# Altium PCB SensorNode_V1.PcbDoc
Units mm, origin at the board's own origin, x right, y up, seen from the top; angles counter-clockwise.
Board outline 82.25 x 54.49 mm, 2 copper layers (Top Layer, Bottom Layer); 19 components, 17 nets, 110 pads, 3 vias.
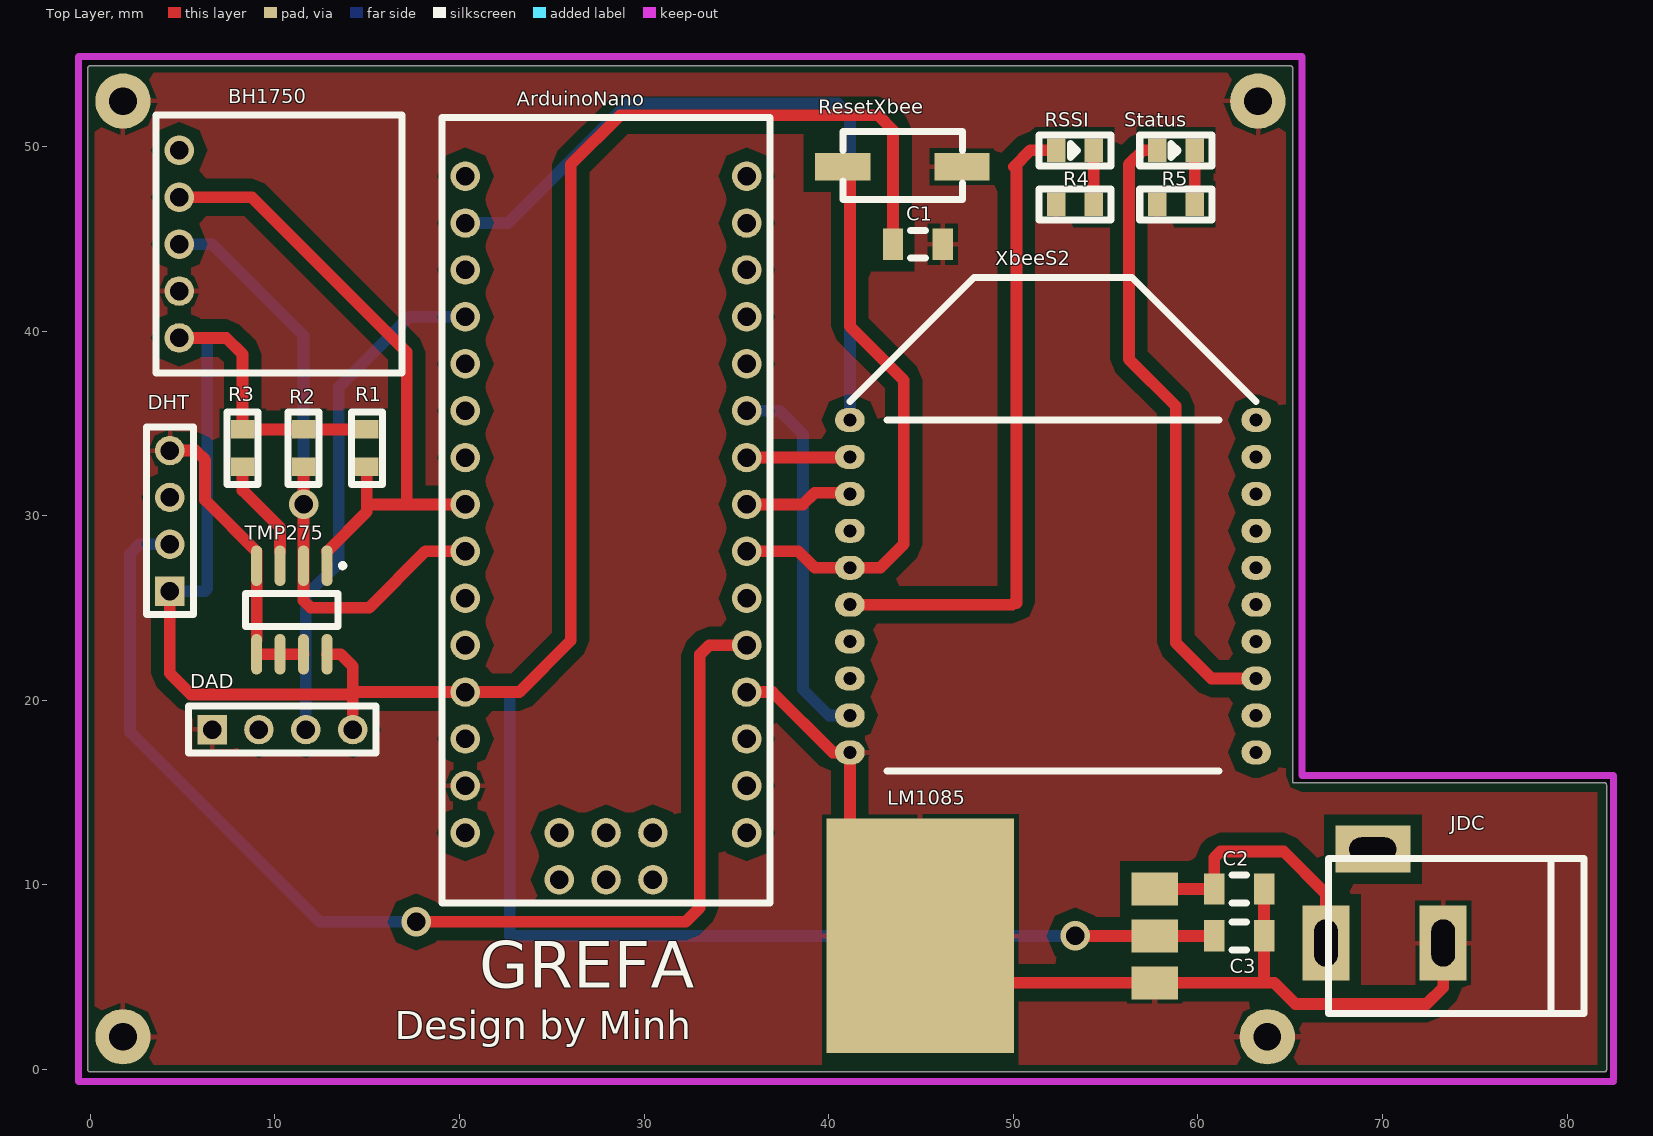
[diagram p0: Top Layer view]
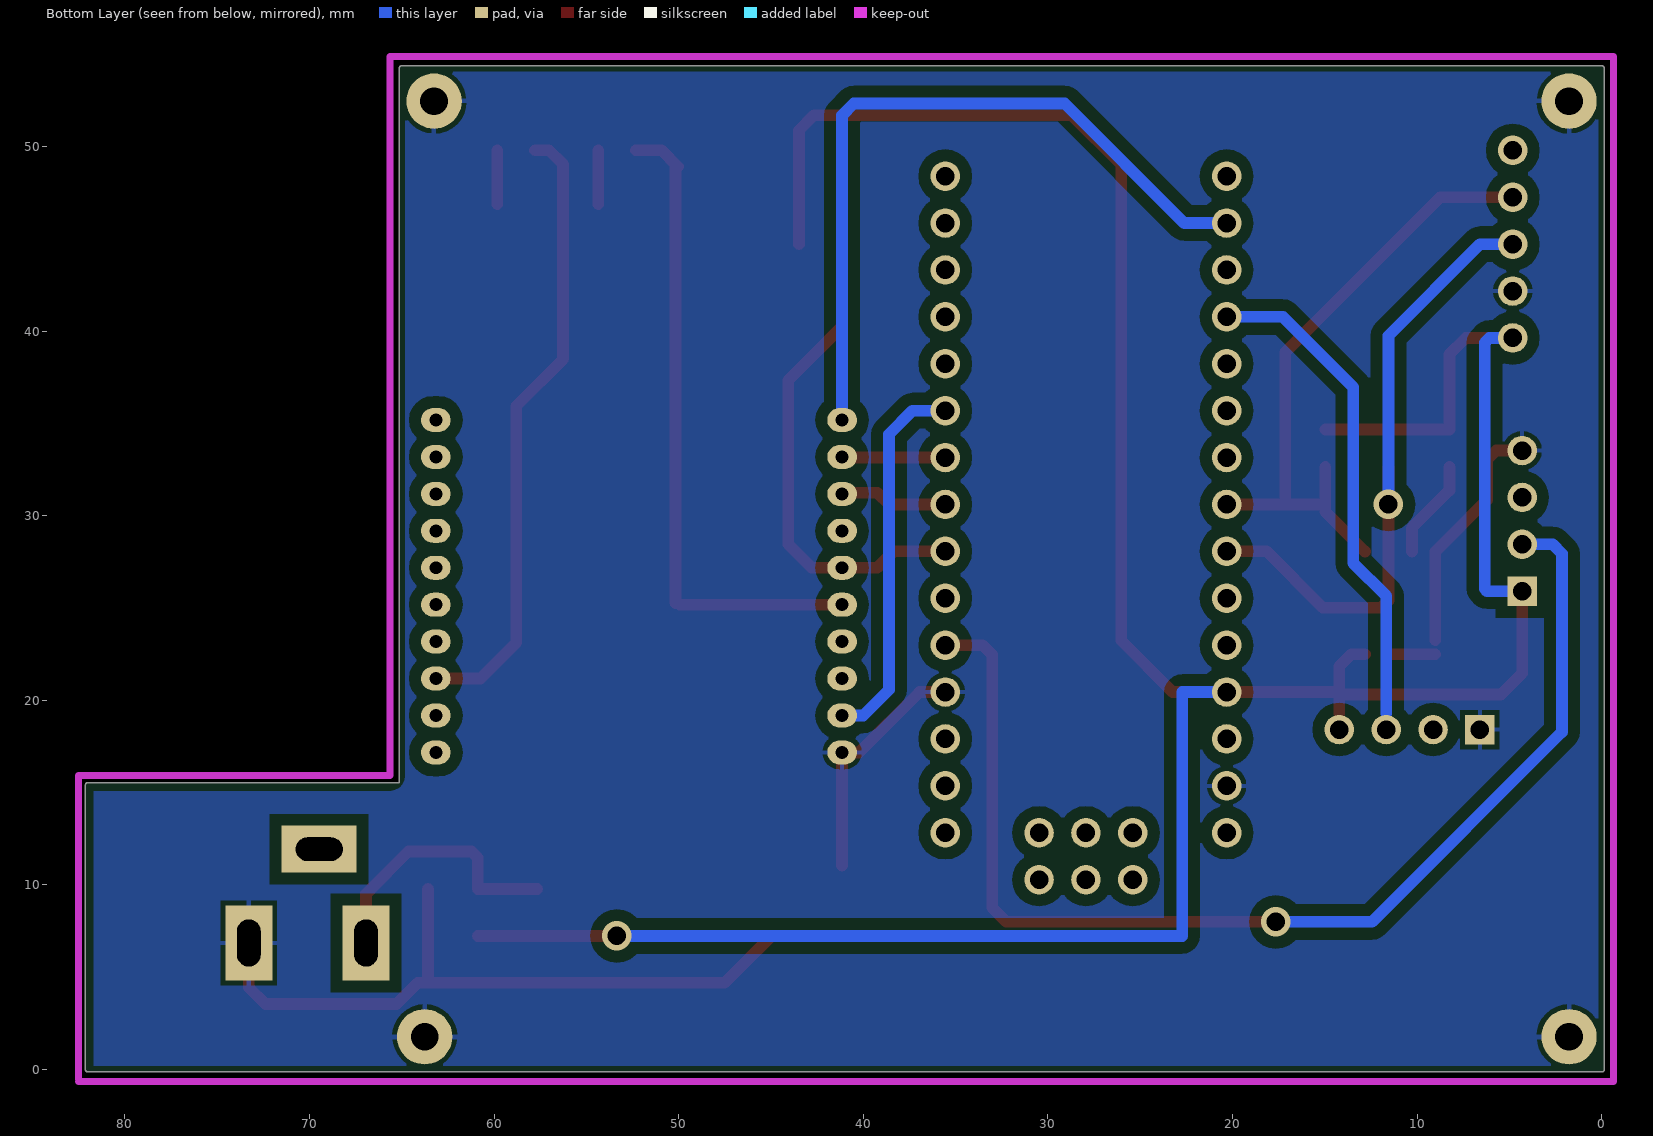
[diagram p1: Bottom Layer view, seen from below]

## Layer stack, top to bottom
Top Solder: solder mask 0.0102, Solder Resist, Dk 3.5
Top Layer: signal copper 0.0356
Dielectric 1: dielectric 0.32, FR-4, Dk 4.8
Bottom Layer: signal copper 0.0356
Bottom Solder: solder mask 0.0102, Solder Resist, Dk 3.5

## Board outline
-0.127,0 ccw(c0,0) 0,-0.127 82,-0.127 ccw(c82,0) 82.127,0 82.127,15.413 ccw(c82,15.413) 82,15.54 65.127,15.54 65.127,54.238 ccw(c65,54.238) 65,54.365 0,54.365 ccw(c0,54.238) -0.127,54.238

## Design rules (kind name [scope] priority, off if disabled: settings)
Clearance [All] p1: gap=0.635
PolygonConnect [All] p1: connectstyle=Relief reliefconductorwidth=0.254 reliefentries=4 polygonreliefangle="90 Angle" airgapwidth=0.254
RoutingVias [All] p1: holewidth=0.711 width=1.27 viastyle="Through Hole" minholewidth=0.711 minwidth=1.27 maxholewidth=0.711 maxwidth=1.27
SolderMaskExpansion [All] p1: expansion=0.102
Width [All] p1: maxlimit=0.762 minlimit=0.508 preferedwidth=0.635
30 further rules are at their usual default settings.

## Components (designator, comment, footprint, x,y, rotation, side; value= is the part's Value field where it differs from the comment)
ArduinoNano "ArduinoNano" ArduinoNano 20.32,12.827 r0 top
BH1750 "BH1750" BH1750 4.826,49.784 r270 top
C1 "Cap Semi" C1206 44.831,44.704 r0 top
C2 "Cap Semi" C1206 62.23,9.779 r0 top
C3 "Cap Semi" C1206 62.23,7.239 r0 top
DAD "DAD" HDR1X4 6.604,18.415 r0 top
DHT "DHT" HDR1X4 4.318,25.908 r90 top
JDC "Jac DC" DC-IN 70.104,9.398 r180 top
LM1085 "LM1085" LM1085 57.658,7.239 r90 top
R1 "R" SMD0805R 14.986,33.655 r90 top
R2 "R" SMD0805R 11.557,33.655 r90 top
R3 "R" SMD0805R 8.255,33.655 r90 top
R4 "R" SMD0805R 53.34,46.863 r0 top
R5 "R" SMD0805R 58.801,46.863 r0 top
ResetXbee "SW" SW2 40.767,48.895 r0 top
RSSI "LED3" SMD0805LED 53.34,49.784 r0 top
Status "LED3" SMD0805LED 58.801,49.784 r0 top
TMP275 "TMP275" SO8_N 10.922,24.892 r270 top
XbeeS2 "XbeeS2" XbeeS2 41.148,35.179 r0 top

## Footprints (in the part's own frame and the unit in brackets; to place one, negate y for a bottom-side part, rotate by r counter-clockwise, add the part's x,y. Pads: shape width x height; smd on the part's side, far side on the other; paste and mask are expansions set on the pad)
ArduinoNano [mm]
  round 1.6 hole 1: 1(15.24,0) 2(15.24,2.54) 3(15.24,5.08) 4(15.24,7.62) 5(15.24,10.16) 6(15.24,12.7) 7(15.24,15.24) 8(15.24,17.78) 9(15.24,20.32) 10(15.24,22.86) 11(15.24,25.4) 12(15.24,27.94) 13(15.24,30.48) 14(15.24,33.02) 15(15.24,35.56) 16(0,35.56) 17(0,33.02) 18(0,30.48) 19(0,27.94) 20(0,25.4) 21(0,22.86) 22(0,20.32) 23(0,17.78) 24(0,15.24) 25(0,12.7) 26(0,10.16) 27(0,7.62) 28(0,5.08) 29(0,2.54) 30(0,0) 31(5.08,-2.54) 32(7.62,-2.54) 33(10.16,-2.54) 34(5.08,0) 35(7.62,0) 36(10.16,0)
  silkscreen extent -1.27,-3.81 16.51,38.73
BH1750 [mm]
  round 1.6 hole 1: 1(0,0) 2(2.54,0) 3(5.08,0) 4(7.62,0) 5(10.16,0)
  silkscreen extent -1.91,-1.27 12.06,12.07
C1206 [mm] "Chip Capacitor, Body 3.2x1.6mm, IPC High Density"
  rect 1.1x1.7 smd: 1(-1.35,0) 2(1.35,0)
  silkscreen extent -0.4,-0.75 0.4,0.75, body extent -1.7,-0.9 1.7,0.9, height 1.3
DC-IN [mil] "Jac DC input"
  rect 100x160 hole 50 slot 100 at 90 deg: 1(125,100) 2(-125,100)
  rect 160x100 hole 50 slot 100 at 0 deg: 3(25,-100)
  silkscreen extent -425,-80 120,250, body extent -410,-105 134,269, height 434
HDR1X4 [mm] "Connector; Header; 4 Position"
  rect 1.6x1.6 hole 1: 1(0,0)
  round 1.6 hole 1: 2(2.54,0) 3(5.08,0) 4(7.62,0)
  silkscreen extent -1.27,-1.27 8.89,1.27, body extent -1.27,-1.27 8.89,1.27, height 7
LM1085 [mil]
  rect 70x100 smd: GND(-100,0) INPUT(100,0) OUTPUT(0,0)
  rect 500x400 smd: GND1(0,500)
SMD0805LED [mm] "Chip LED, Body 2.0 x 1.3 mm (LxW typ)"
  rect 1x1.27 smd: 1(-1.016,0) 2(1.016,0)
  silkscreen extent -1.96,-0.84 1.96,0.84, body extent -1,-0.62 1,0.63, height 0.78
SMD0805R [mm] "Chip Resistor; Body 2.0 x 1.3 mm (LxW typ)"
  rect 1x1.27 smd: 1(-1.016,0) 2(1.016,0)
  silkscreen extent -1.96,-0.84 1.96,0.84, body extent -1,-0.62 1,0.63, height 0.78
SO8_N [mm] "8-Pin Small Outline Integrated Circuit 1.27 mm Pitch, IPC Medium Density"
  oval 2.2x0.6 smd: 1(-2.4,1.905) 2(-2.4,0.635) 3(-2.4,-0.635) 4(-2.4,-1.905) 5(2.4,-1.905) 6(2.4,-0.635) 7(2.4,0.635) 8(2.4,1.905)
  silkscreen extent -2.52,-2.5 0.9,2.88, body extent -1.95,-2.45 1.95,2.45, height 1.75
SW2 [mm]
  rect 3x1.5 smd: 1(0,0) 2(6.45,0)
  silkscreen extent 0,-1.78 6.48,1.91
XbeeS2 [mm]
  oval 1.6x1.3 hole 0.7: 1(0,0) 2(0,-2) 3(0,-4) 4(0,-6) 5(0,-8) 6(0,-10) 7(0,-12) 8(0,-14) 9(0,-16) 10(0,-18) 11(22,-18) 12(22,-16) 13(22,-14) 14(22,-12) 15(22,-10) 16(22,-8) 17(22,-6) 18(22,-4) 19(22,-2) 20(22,0)
  silkscreen extent 0,-19 22,7.72

## Part data
C1 C2 C3: "Capacitor (Semiconductor SIM Model)"
JDC: library part DCIN, "Jac DC input"
R1 R2 R3 R4 R5: "RES_08"
ResetXbee: library part SW2, "Switch button 2 pin"
RSSI Status: library part LEDSMD, "LED SMD"

## Free pads (board coordinates)
  round 3 hole 1.5: 2(1.778,52.451) 3(1.778,1.778) 4(63.246,52.451) 5(63.754,1.778)

## Via types
v1: diameter 1.6, hole 1, Top Layer to Bottom Layer, 3 vias

## Nets (pads, with @x,y where several pads share a name; then routed paths per layer and width w, separated by ;. In a path a pad name is that pad's centre, name@x,y a point inside that pad or via, vN(x,y) a via of type N, cw(c..) or ccw(c..) an arc to the next point about the centre after c; other vN are vias at no path point)
3V3: ArduinoNano.17 XbeeS2.1 | length 40.3
  Bottom Layer w0.635: ArduinoNano.17 22.606,45.847 29.083,52.324 40.513,52.324 41.148,51.689 XbeeS2.1
5V: ArduinoNano.27 BH1750.5 C1.1 C3.1 DAD.4 DHT.1 LM1085.OUTPUT R1.2 R2.2 R3.2 TMP275.8 | length 168.3
  Top Layer w0.635: DHT.1 4.318,21.463 5.461,20.32 14.224,20.32 ; BH1750.5 7.366,39.624 8.255,38.735 R3.2 R1.2 ; TMP275.8 13.576,22.492 14.224,21.844 14.224,20.447 ; 14.224,19.304 14.224,20.447 ; C1.1 43.481,50.88 42.672,51.689 28.702,51.689 26.035,49.022 26.035,23.241 23.241,20.447 ArduinoNano.27 14.224,20.447 ; v1(53.34,7.239) LM1085.OUTPUT C3.1
  Bottom Layer w0.635: DHT.1 6.223,25.908 6.35,26.035 6.35,39.37 6.096,39.624 BH1750.5 ; ArduinoNano.27 22.733,20.447 22.733,7.239 v1(53.34,7.239)
GND: ArduinoNano.4 ArduinoNano.29 BH1750.4 C1.2 C2.2 C3.2 DAD.1 DHT.4 JDC.2 LM1085.GND LM1085.GND1 pad.2 pad.3 pad.4 pad.5 R4.1 R5.1 ResetXbee.2 TMP275.4 TMP275.5 TMP275.6 TMP275.7 XbeeS2.10 | length 66.4
  Top Layer w0.635: DHT.4 5.715,33.528 6.223,33.02 6.223,30.848 9.017,28.054 TMP275.4 TMP275.5@9.017,23.254 ; TMP275.5 TMP275.6 TMP275.7 ; ArduinoNano.4 36.957,20.447 40.225,17.179 XbeeS2.10 LM1085.GND1@41.148,11.049 ; LM1085.GND1 47.498,4.699 LM1085.GND 63.58,4.699 ; C2.2 C3.2 63.58,4.699 ; JDC.2 73.279,4.445 72.39,3.556 65.278,3.556 64.135,4.699 63.58,4.699
NetArduinoNano_5: ArduinoNano.5 DHT.2 | length 63.9
  Top Layer w0.635: v1(17.653,8.001) 32.258,8.001 33.02,8.763 33.02,22.479 33.528,22.987 ArduinoNano.5
  Bottom Layer w0.635: DHT.2 2.667,28.448 2.159,27.94 2.159,18.288 12.446,8.001 v1(17.653,8.001)
NetArduinoNano_7: ArduinoNano.7 ResetXbee.1 XbeeS2.5 | length 31.1
  Top Layer w0.635: ArduinoNano.7 38.354,28.067 39.242,27.179 XbeeS2.5 42.8,27.179 44.069,28.448 44.069,37.338 41.148,40.259 ResetXbee.1@41.148,48.895
NetArduinoNano_8: ArduinoNano.8 XbeeS2.3 | length 5.9
  Top Layer w0.635: ArduinoNano.8 38.608,30.607 39.243,31.242 40.958,31.242 XbeeS2.3@41.148,31.052
NetArduinoNano_9: ArduinoNano.9 XbeeS2.2 | length 5.5
  Top Layer w0.635: ArduinoNano.9 XbeeS2.2@41.053,33.147
NetArduinoNano_10: ArduinoNano.10 XbeeS2.9 | length 20.5
  Bottom Layer w0.635: ArduinoNano.10 37.338,35.687 38.608,34.417 38.608,20.574 40.003,19.179 XbeeS2.9
NetArduinoNano_19: ArduinoNano.19 DAD.3 | length 26.8
  Bottom Layer w0.635: 11.684,19.304 11.684,25.654 13.462,27.432 13.462,36.957 17.272,40.767 ArduinoNano.19
NetArduinoNano_23: ArduinoNano.23 BH1750.2 R1.1 TMP275.1 | length 34.7
  Top Layer w0.635: BH1750.2 8.763,47.244 17.145,38.862 17.145,30.734 ; TMP275.1@12.827,28.054 14.986,30.213 14.986,30.607 ; R1.1 14.986,30.607 ; ArduinoNano.23 14.986,30.607
NetArduinoNano_24: ArduinoNano.24 BH1750.3 R2.1 TMP275.2 | length 35.1
  Top Layer w0.635: TMP275.2@11.557,28.054 11.557,25.4 11.938,25.019 15.113,25.019 18.161,28.067 ArduinoNano.24 ; TMP275.2@11.557,28.181 v1(11.557,30.607) R2.1
  Bottom Layer w0.635: BH1750.3 6.604,44.704 11.557,39.751 v1@11.557,30.734
NetR3_1: R3.1 TMP275.3 | length 5.4
  Top Layer w0.635: R3.1 8.255,31.369 10.287,29.337 TMP275.3@10.287,28.054
NetR4_2: R4.2 RSSI.2 | length 2.9
  Top Layer w0.635: R4.2 RSSI.2
NetR5_2: R5.2 Status.2 | length 2.9
  Top Layer w0.635: R5.2 Status.2
NetRSSI_1: RSSI.1 XbeeS2.6 | length 35.2
  Top Layer w0.635: XbeeS2.6 49.944,25.179 50.038,25.273 ; 50.038,48.895 50.927,49.784 RSSI.1 ; 50.165,25.273 50.165,48.895
NetStatus_1: Status.1 XbeeS2.13 | length 33.9
  Top Layer w0.635: Status.1 57.023,49.784 56.261,49.022 56.261,38.481 58.801,35.941 58.801,23.114 60.736,21.179 XbeeS2.13
VCC: C2.1 JDC.1 LM1085.INPUT | length 14.7
  Top Layer w0.635: LM1085.INPUT C2.1 60.88,11.477 61.214,11.811 64.643,11.811 66.929,9.525 JDC.1
pads on no net: ArduinoNano.1 ArduinoNano.2 ArduinoNano.3 ArduinoNano.6 ArduinoNano.11 ArduinoNano.12 ArduinoNano.13 ArduinoNano.14 ArduinoNano.15 ArduinoNano.16 ArduinoNano.18 ArduinoNano.20 ArduinoNano.21 ArduinoNano.22 ArduinoNano.25 ArduinoNano.26 ArduinoNano.28 ArduinoNano.30 ArduinoNano.31 ArduinoNano.32 ArduinoNano.33 ArduinoNano.34 ArduinoNano.35 ArduinoNano.36 BH1750.1 DAD.2 DHT.3 JDC.3 XbeeS2.4 XbeeS2.7 XbeeS2.8 XbeeS2.11 XbeeS2.12 XbeeS2.14 XbeeS2.15 XbeeS2.16 XbeeS2.17 XbeeS2.18 XbeeS2.19 XbeeS2.20

## Polygon pours and split planes (outlines as drawn)
GND on Top Layer "Bottom Layer-No Net" (solid, remove dead copper, pour order 2): 0,0 0,54.229 65.024,54.229 65.024,15.367 82.042,15.367 82.042,0
GND on Bottom Layer "Bottom Layer-No Net" (solid, pour order 4): 0,0 0,54.229 65.024,54.229 65.024,15.494 65.024,15.367 82.042,15.367 82.042,0

## Keep-outs
Keep-Out Layer:
  lines w0.381: -0.635,-0.635 -0.635,54.873 65.635,54.873 65.635,15.921 82.508,15.921 82.508,-0.508 ; -0.508,-0.635 82.508,-0.635

## Silkscreen, mask and mechanical layers (free items; w line width, h text height)
Top Overlay:
  text "GREFA" at 21.082,4.445 h2.54
  text "Design by Minh" at 16.51,1.651 h1.52